# Altium PCB DATN.PcbDoc
Units mm, origin at the board's own origin, x right, y up, seen from the top; angles counter-clockwise.
Board outline 57.94 x 44.83 mm, 2 copper layers (Top Layer, Bottom Layer); 22 components, 21 nets, 75 pads, 92 vias.
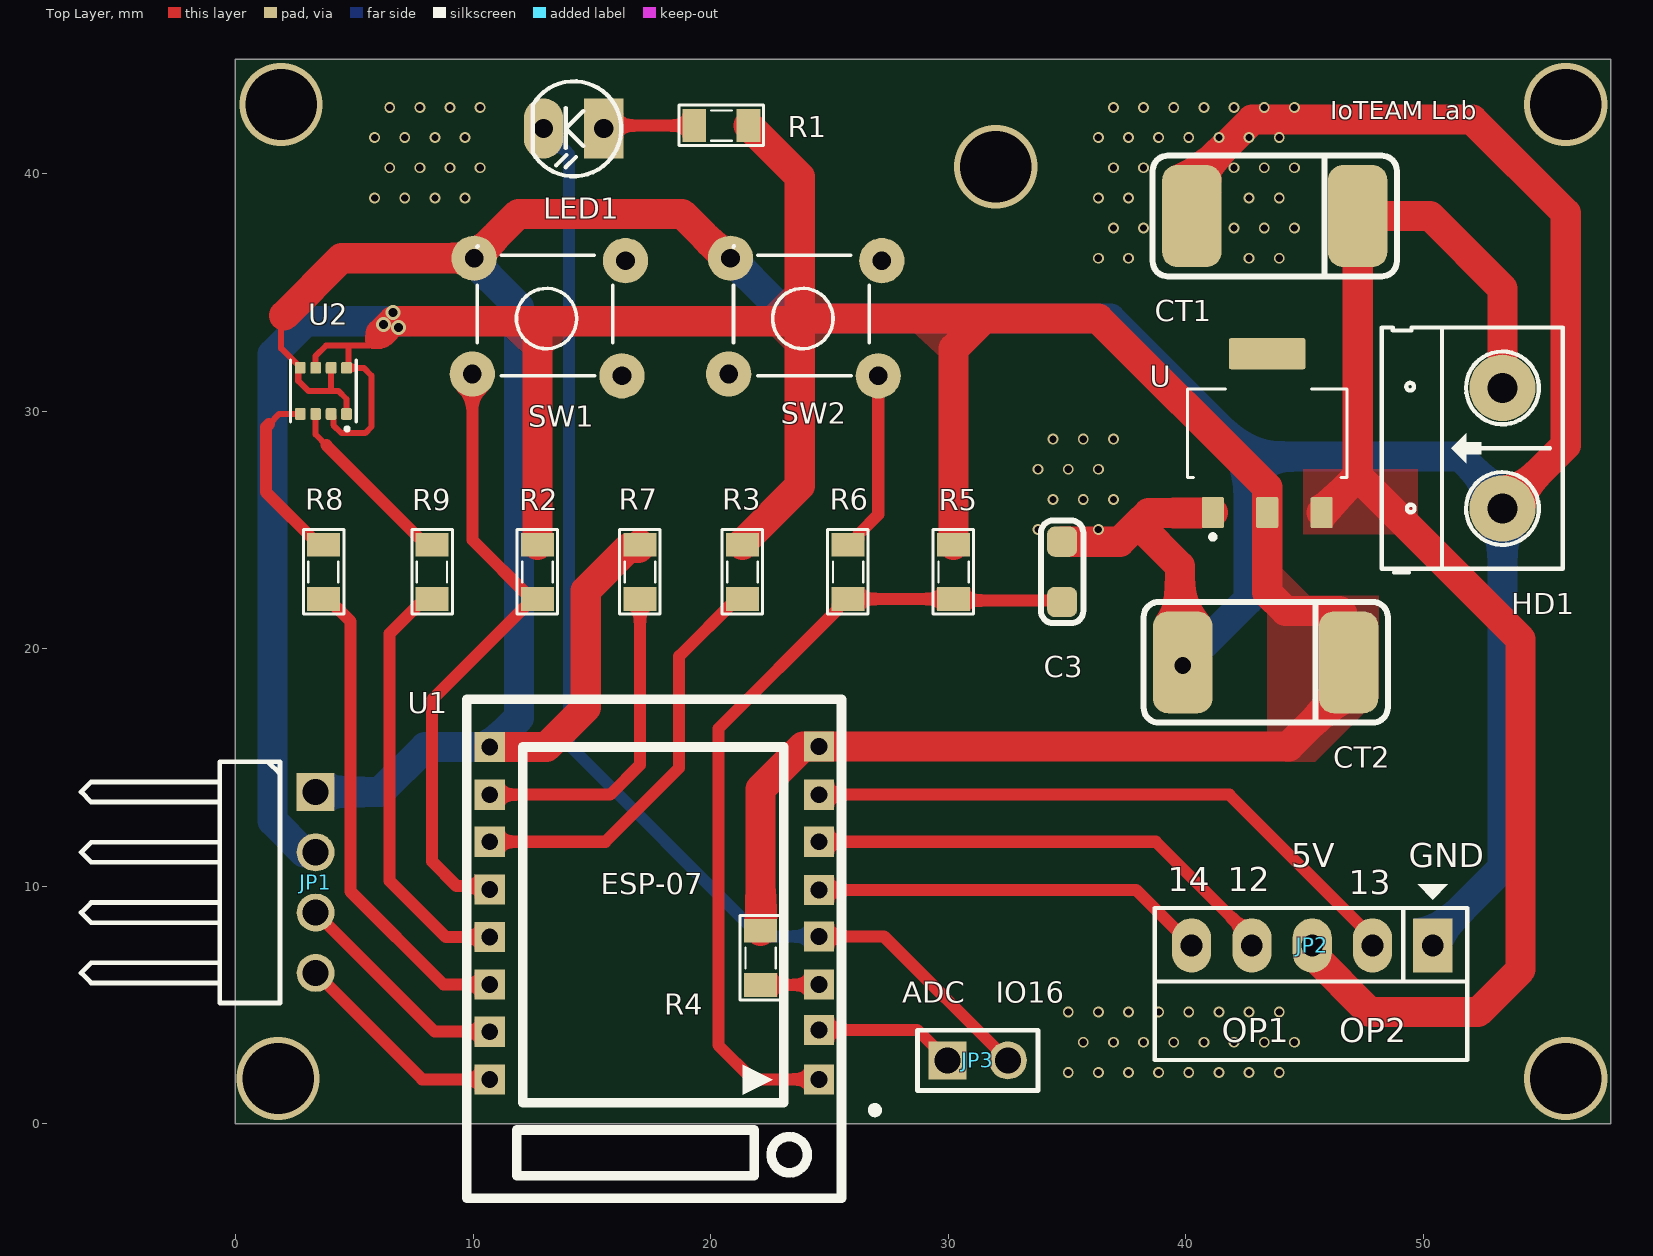
[diagram p0: Top Layer view]
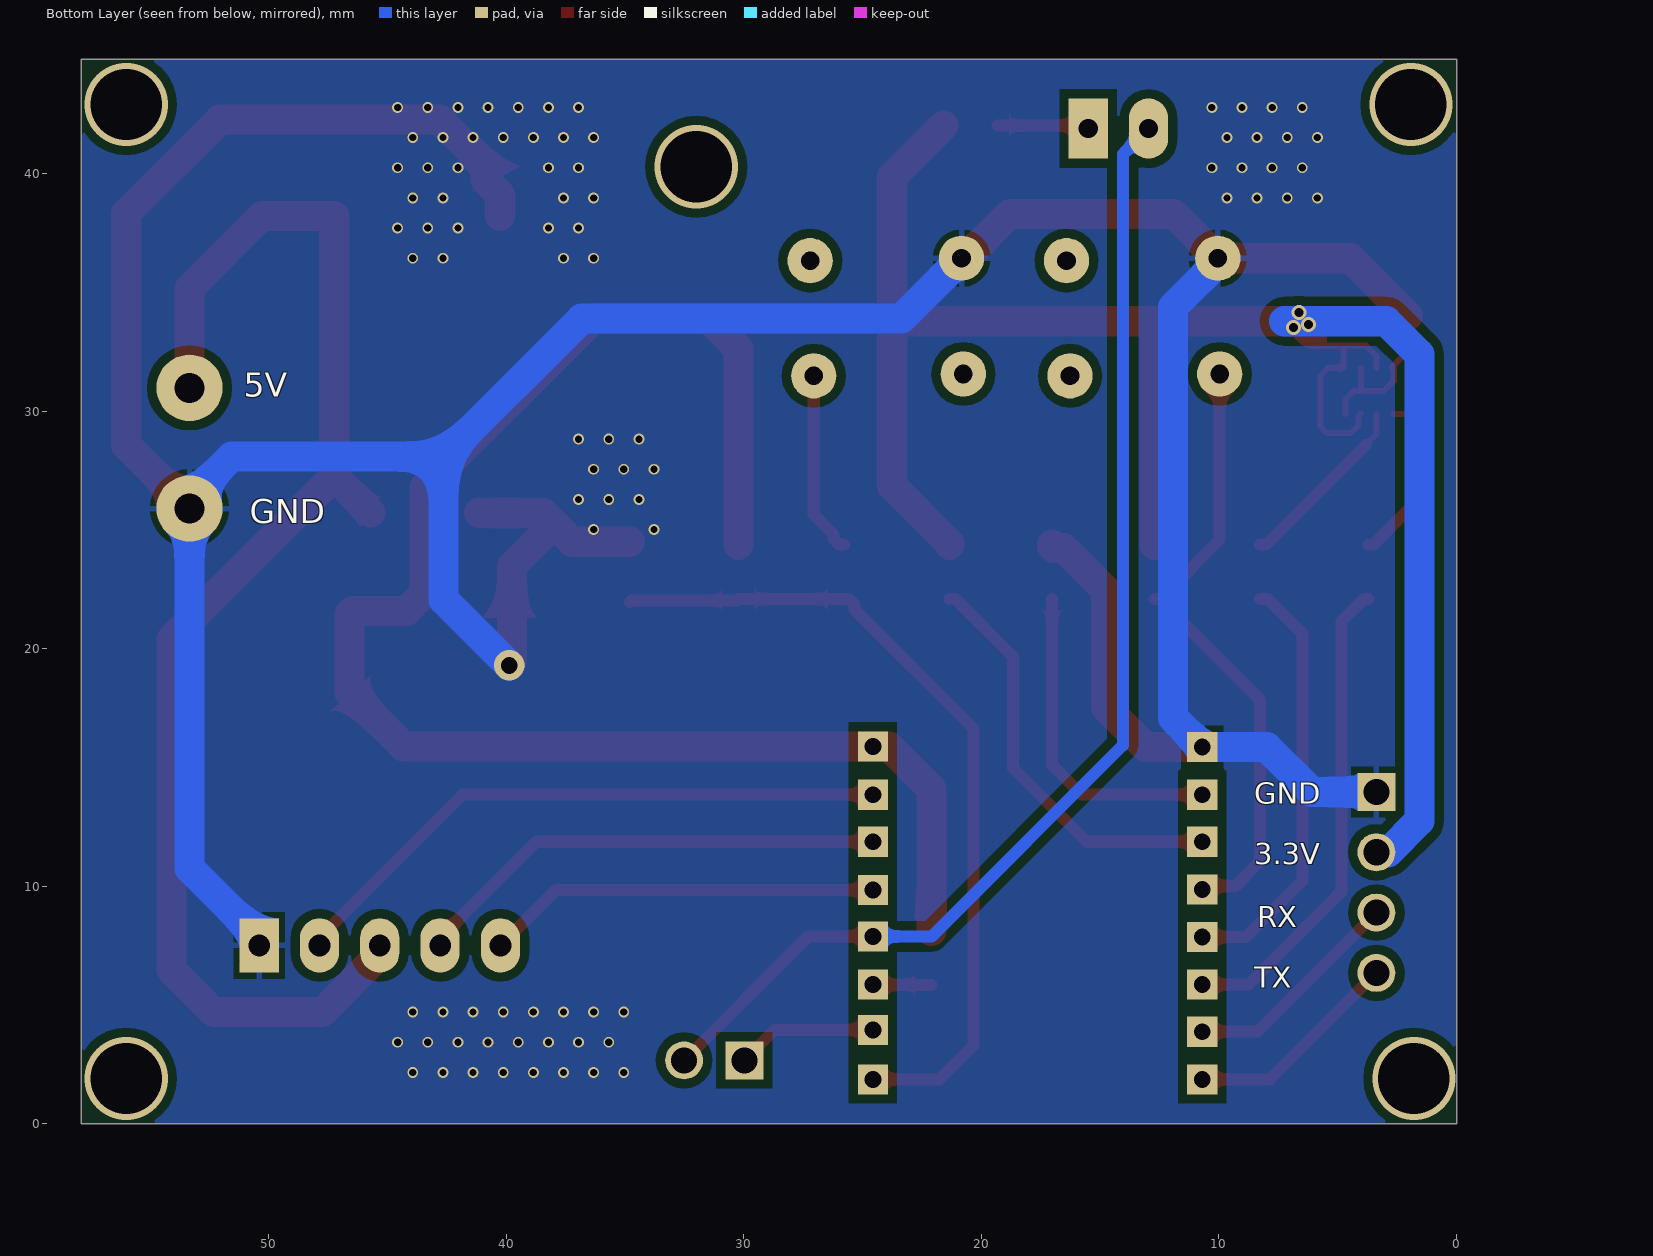
[diagram p1: Bottom Layer view, seen from below]

## Layer stack, top to bottom
Top Solder: solder mask 0.0102, Solder Resist, Dk 3.5
Top Layer: signal copper 0.0356
Dielectric 1: dielectric 0.32, FR-4, Dk 4.8
Bottom Layer: signal copper 0.0356
Bottom Solder: solder mask 0.0102, Solder Resist, Dk 3.5

## Board outline
-0.021,-0.008 -0.021,44.823 57.916,44.823 57.916,-0.008

## Design rules (kind name [scope] priority, off if disabled: settings)
Clearance "Stitching No Net" [IsStitchingVia and InNet('No Net') vs (IsVia and (Not IsStitchingVia)) Or IsPad] p1: gap=0.127 ignorepadtopadclearanceinfootprint=FALSE
Clearance [All] p2: gap=0.381 ignorepadtopadclearanceinfootprint=TRUE
PolygonConnect [All] p1: thpad.connectstyle=Relief thpad.reliefconductorwidth=0.254 thpad.reliefentries=4 thpad.polygonreliefangle="90 Angle" thpad.airgapwidth=0.254 smdpad.connectstyle=Relief smdpad.reliefconductorwidth=0.254 smdpad.reliefentries=4 smdpad.polygonreliefangle="90 Angle" smdpad.airgapwidth=0.254 via.connectstyle=Direct via.reliefconductorwidth=0.254 via.reliefentries=4 via.polygonreliefangle="90 Angle" via.airgapwidth=0.254
RoutingVias [All] p1: holewidth=0.711 width=1.27 viastyle="Through Hole" minholewidth=0.711 minwidth=1.27 maxholewidth=0.711 maxwidth=1.27
SolderMaskExpansion [All] p1: expansion=0.102
Width [All] p1: maxlimit=1.27 minlimit=0.254 preferedwidth=0.508
30 further rules are at their usual default settings.

## Components (designator, comment, footprint, x,y, rotation, side; value= is the part's Value field where it differs from the comment)
C3 "470pF" CAP_0805 34.802,23.233 r270 top value=100pF
CT1 "CAP_TAN_SMD" CAP_7343 43.819,38.219 r180 top (schematic designator C1)
CT2 "CAP_TAN_SMD" CAP_7343 43.438,19.423 r180 top (schematic designator C2)
HD1 "Header 2" HED2 53.344,25.9 r90 top
JP1 "JP4" JP4-D1C 0.822,5.072 r270 top
JP2 "JP5_2" JP5H 50.412,7.5 r180 top
JP3 "JP2" JP2-D1T 29.976,2.659 r0 top
LED1 "LED" LED-3 15.498,41.902 r180 top value="LED 3 ly Single Colour"
R1 "470" RES-SMD-0805 20.451,42.029 r180 top value="R1/4W - 1K"
R2 "10k" RES-SMD-0805 12.704,23.233 r270 top value="R1/4W - 1K"
R3 "10k" RES-SMD-0805 21.34,23.233 r270 top value="R1/4W - 1K"
R4 "10k" RES-SMD-0805 22.102,6.977 r270 top value="R1/4W - 1K"
R5 "10k" RES-SMD-0805 30.23,23.233 r270 top value="R1/4W - 1K"
R6 "470" RES-SMD-0805 25.785,23.233 r270 top value="R1/4W - 1K"
R7 "10k" RES-SMD-0805 17.022,23.233 r270 top value="R1/4W - 1K"
R8 "4.7k" RES-SMD-0805 3.687,23.233 r90 top value="R1/4W - 1K"
R9 "4.7k" RES-SMD-0805 8.259,23.233 r90 top value="R1/4W - 1K"
SW1 "SW" SW4 16.26,31.488 r180 top value="Button chip 4 pin"
SW2 "SW" SW4 27.055,31.488 r180 top value="Button chip 4 pin"
U "AMS1117-3.3" SOT229P700X180-4N 43.438,29.075 r0 top
U1 "ESP 12" ESP12_small 17.657,7.358 r180 top
U2 "BME280" PSON65P250X250X100-8N 3.687,30.853 r270 top

## Footprints (in the part's own frame and the unit in brackets; to place one, negate y for a bottom-side part, rotate by r counter-clockwise, add the part's x,y. Pads: shape width x height; smd on the part's side, far side on the other; paste and mask are expansions set on the pad)
CAP_0805 [mm]
  rrect50% 1.27x1.27 smd: 1(-1.27,0) 2(1.27,0)
  silkscreen extent -2.16,-0.89 2.16,0.89, body extent -1.01,-0.64 1.01,0.64, height 0.61
CAP_7343 [mm] "Capacitor Tantalum 7343"
  rrect50% 2.5x4.3 smd: 1(-3.429,0) 2(3.556,0)
  silkscreen extent -5.08,-2.54 5.21,2.54, body extent -3.75,-2.14 3.75,2.16, height 2.8
ESP12_small [mm]
  rect 1.27x1.27 hole 0.71: 1(-6.91,5.499) 2(-6.91,3.416) 3(-6.91,1.511) 4(-6.91,-0.521) 5(-6.91,-2.477) 6(-6.91,-4.509) 7(-6.91,-6.49) 8(-6.91,-8.522) 9(6.963,-8.496) 10(6.963,-6.49) 11(6.963,-4.508) 12(6.963,-2.502) 13(6.963,-0.495) 14(6.963,1.511) 15(6.963,3.493) 16(6.963,5.499)
  silkscreen extent -9.41,-10.5 7.92,10.5, body extent -8.12,-9.97 8.13,14.03, height 9
HED2 [mil] "Header 2, 2 pin, hight 300mil, Pin to Pin 200, Colour Green"
  round 110 hole 50: 1(0,0) 2(200,0)
  silkscreen extent -106,-100 300,200, body extent -92,-140 302,155, height 394
JP2-D1T [mm] "2 pins, 1 row, straight, gold plating"
  rect 1.6x1.6 hole 1.1: 1(0,0)
  round 1.6 hole 1.1: 2(2.54,0)
  silkscreen extent -1.27,-1.27 3.81,1.27, body extent -1.27,-1.27 3.81,1.27, height 8.54
JP4-D1C [mm] "4 pins, 1 row, right angled, gold plating"
  rect 1.6x1.6 hole 1.1: 1(-8.89,2.54)
  round 1.6 hole 1.1: 2(-6.35,2.54) 3(-3.81,2.54) 4(-1.27,2.54)
  silkscreen extent -10.16,-7.34 0,1.04, body extent -10.16,-7.57 0,2.79, height 2.54
JP5H [mil]
  rect 65x90 hole 36: 1(0,0)
  oval 65x90 hole 36: 2(100,0) 3(200,0) 4(300,0) 5(400,0)
  silkscreen extent -57,-101 461,190, body extent -46,-15 446,424, height 99
LED-3 [mil] "LED 2 PIN, 3ly Only colour"
  rect 65x100 hole 32: 1(0,0)
  oval 65x100 hole 32: 2(100,0)
  silkscreen extent -29,-78 118,79, body extent -13,-75 125,75, height 217
PSON65P250X250X100-8N [mm]
  rrect25% 0.49x0.45 smd: 1(0.97,0.975) 2(0.97,0.325) 3(0.97,-0.325) 4(0.97,-0.975) 5(-0.97,-0.975) 6(-0.97,-0.325) 7(-0.97,0.325) 8(-0.97,0.975)
  silkscreen extent -1.3,-1.39 1.65,1.39, body extent -1.25,-1.25 1.25,1.25, height 1
RES-SMD-0805 [mil]
  rect 39.37x55 smd: 1(-45,0) 2(45,0)
  silkscreen extent -70,-34 70,33, body extent -39,-25 39,25, height 31
SOT229P700X180-4N [mm]
  rrect15% 0.93x1.31 smd: 1(-2.29,-3.345) 2(0,-3.345) 3(2.29,-3.345)
  rrect15% 3.24x1.31 smd: 4(0,3.345)
  silkscreen extent -3.36,-4.47 3.36,1.86, body extent -3.25,-3.63 3.25,3.37, height 1.65
SW4 [mil] "SW button 4pin, 250 x250 mil"
  round 75 hole 31: 1(0,0) 2(245,-195) 3(248,-3) 4(-6,-191)
  silkscreen extent 15,-215 240,0, body extent -36,-220 276,24, height 276

## Part data
C3: library part CN1, "Cap np  1pF - 472pF"
CT1 CT2: "Polazied Tantalum Capacitor"
HD1: library part Hed2, "Header 2 (Green)"
JP1: "WR-PHD 2.54 mm Angled Socket Header", Manufacturer="Würth Elektronik eiSos GmbH", partNo=613004143121, ComponentLink1 Description=Manufacturer, ComponentLink1URL=http://www.we-online.com, ComponentLink2 Description=Datasheet, ComponentLink2URL=http://katalog.we-online.de/em/datasheet/6130xx143121.pdf, Created by="Karrer Zheng", Created Date="29 March 2013", NoPins=04
JP3: "WR-PHD 2.54 mm Angled Socket Header", Manufacturer="Würth Elektronik eiSos GmbH", partNo=613002143121, ComponentLink1 Description=Manufacturer, ComponentLink1URL=http://www.we-online.com, ComponentLink2 Description=Datasheet, ComponentLink2URL=http://katalog.we-online.de/em/datasheet/6130xx143121.pdf, Created by="Karrer Zheng", Created Date="29 March 2013", NoPins=02
LED1: "LED Single colour Green and Red"
R1 R2 R3 R4 R5 R6 R7 R8 R9: library part R, "Resistor 1/4W"
SW1 SW2: library part SW4, "Switch button 4 pin"
U: "Sot223/Pkg 1-Amp 3.3-Volt Low Drop Out Voltage Regulatator", Package=None, Availability=Unavailable, MF="Advanced Monolithic Systems", MP=AMS1117-3.3, Price=None, SnapEDA_Link=https://www.snapeda.com/parts/AMS1117-3.3/Advanced%20Monolithic%20Systems/view-part/53450/?ref=snap
U1: library part ESP_12, "ESP-12 Wi-Fi Module by AI-Thinker", IC=ESP8266-EX, Vendor=Ai-thinker
U2: "DIGITAL HUMIDITY, PRESSURE AND TEMPERATURE SENSOR<br>* Digital interface I虏C (up to 3.4 MHz) and SPI (3 and 4 wire, up to 10 MHz)* Supply voltage VDD main supply voltage range: 1.71 V to 3.6 V*VDDIO interface voltage range: 1.2 V to 3.6 V<br> Operating range -40鈥", Package=None, Availability=Unavailable, MP=BME280, Price=None

## Via types
v1: diameter 0.457, hole 0.305, Top Layer to Bottom Layer, tented both sides, 83 vias
v2: diameter 3.5, hole 3, Top Layer to Bottom Layer, tented both sides, 5 vias
v3: diameter 0.635, hole 0.381, Top Layer to Bottom Layer, tented both sides, 3 vias
v4: diameter 1.27, hole 0.711, Top Layer to Bottom Layer, tented both sides, 1 vias

## Nets (pads, with @x,y where several pads share a name; then routed paths per layer and width w, separated by ;. In a path a pad name is that pad's centre, name@x,y a point inside that pad or via, vN(x,y) a via of type N, cw(c..) or ccw(c..) an arc to the next point about the centre after c; other vN are vias at no path point)
+3.3V: CT2.1 JP1.2 R1.1 R2.1 R3.1 R4.1 R5.1 U1.8 U2.2 U2.6 U2.8 U.2 | length 161.6
  Top Layer w0.254: U2.6 3.362,32.328 3.8,32.766 4.7,32.766 ; U2.2 4.11,29.785 4.11,29.414 4.449,29.075 5.443,29.075 5.715,29.347 5.715,31.496 5.388,31.823 4.745,31.823 4.745,32.721 4.7,32.766 ; 6.1,33.266 5.6,32.766 4.7,32.766
  Top Layer w1.27: 6.1,33.266 6.619,33.785 23.637,33.785 23.753,33.901 ; R2.1 12.704,33.647 12.831,33.774 ; R3.1 21.34,24.447 23.753,26.86 23.753,33.901 ; R1.1 23.753,39.87 23.753,33.901 ; R4.1 22.102,14.089 23.892,15.879 U1.8 44.351,15.879 46.613,18.142 46.613,21.459 46.482,21.59 44.208,21.59 43.438,22.36 U.2 43.438,26.793 36.33,33.901 31.496,33.901 ; R5.1 30.23,32.635 31.496,33.901 ; 23.753,33.901 31.496,33.901
  Bottom Layer w1.27: JP1.2 2.865,11.422 1.546,12.741 1.546,32.395 2.936,33.785 7.239,33.785
  other v3: 6.858,33.528 6.223,33.647 6.619,34.163
+5V: CT1.1 HD1.2 JP2.3 U.3 | length 59.2
  Top Layer w1.27: JP2.3 45.332,7.118 47.759,4.691 52.316,4.691 54.106,6.481 54.106,20.392 47.248,27.25 ; U.3 47.248,27.25 ; HD1.2 53.344,35.171 50.296,38.219 CT1.1 47.248,27.25
ADC: JP3.1 U1.2 | length 5.9
  Top Layer w0.508: U1.2 28.693,3.941 JP3.1
EN: R4.2 U1.3 | length 2.5
  Top Layer w0.508: R4.2 22.108,5.84 24.561,5.84 U1.3
GND: C3.1 CT1.2 CT2.2 HD1.1 JP1.1 JP2.1 R7.1 SW1.2 SW2.2 U1.9 U2.1 U2.5 U2.7 U.1 | length 184.9
  Top Layer w0.254: 2.036,34.028 1.909,33.901 1.909,32.646 2.712,31.843 U2.5 ; U2.5@2.629,31.823 2.629,31.276 3.052,30.853 3.941,30.853 ; U2.7 4.012,30.924 3.941,30.853 ; U2.1 4.662,30.513 4.322,30.853 3.941,30.853
  Top Layer w1.27: 2.036,34.028 4.449,36.441 SW1.2 11.904,38.308 18.793,38.308 20.66,36.441 SW2.2 ; U1.9 13.072,15.854 14.736,17.518 14.736,22.439 16.538,24.241 16.959,24.241 17.022,24.304 R7.1 ; C3.1 37.231,24.503 37.985,25.257 ; CT2.2 39.764,19.541 39.764,23.478 37.985,25.257 ; CT1.2 40.263,39.119 40.878,39.734 40.878,40.358 42.803,42.283 52.074,42.283 56.011,38.346 56.011,28.567 HD1.1 ; U.1 41.128,25.71 38.438,25.71 37.985,25.257
  Bottom Layer w1.27: JP1.1 6.082,13.962 7.974,15.854 U1.9 11.929,17.089 11.929,34.377 10.037,36.269 SW1.2 ; SW2.2 23.372,33.901 36.834,33.901 42.645,28.09 ; v4(39.882,19.296) 42.645,22.058 42.645,28.09 ; JP2.1 50.412,7.818 53.344,10.75 HD1.1 53.344,26.312 51.566,28.09 42.645,28.09
  other v1: 35.056,2.151 36.326,2.151 37.596,2.151 38.866,2.151 40.136,2.151 41.406,2.151 42.676,2.151 43.946,2.151 35.691,3.421 36.961,3.421 38.231,3.421 39.501,3.421 40.771,3.421 42.041,3.421 43.311,3.421 44.581,3.421 35.056,4.691 36.326,4.691 37.596,4.691 38.866,4.691 40.136,4.691 41.406,4.691 42.676,4.691 43.946,4.691 33.786,25.011 36.326,25.011 34.421,26.281 35.691,26.281 36.961,26.281 33.786,27.551 35.056,27.551 36.326,27.551 34.421,28.821 35.691,28.821 36.961,28.821 36.326,36.441 37.596,36.441 42.676,36.441 43.946,36.441 36.961,37.711 38.231,37.711 42.041,37.711 43.311,37.711 44.581,37.711 5.846,38.981 7.116,38.981 8.386,38.981 9.656,38.981 36.326,38.981 37.596,38.981 42.676,38.981 43.946,38.981 6.481,40.251 7.751,40.251 9.021,40.251 10.291,40.251 36.961,40.251 38.231,40.251 42.041,40.251 43.311,40.251 44.581,40.251 5.846,41.521 7.116,41.521 8.386,41.521 9.656,41.521 36.326,41.521 37.596,41.521 38.866,41.521 40.136,41.521 41.406,41.521 42.676,41.521 43.946,41.521 6.481,42.791 7.751,42.791 9.021,42.791 10.291,42.791 36.961,42.791 38.231,42.791 39.501,42.791 40.771,42.791 42.041,42.791 43.311,42.791 44.581,42.791
IO0: R2.2 SW1.3 U1.12 | length 26.4
  Top Layer w0.508: SW1.3 9.961,24.579 R2.2@12.45,22.09 ; U1.12 10.551,10.003 9.297,10.003 8.259,11.041 8.259,17.843 12.506,22.09 R2.2
IO2: R3.2 U1.11 | length 17.6
  Top Layer w0.508: U1.11 15.562,11.866 18.673,14.978 18.673,19.677 21.086,22.09 R3.2
IO4: R9.1 U1.13 | length 18
  Top Layer w0.508: R9.1 7.934,22.09 6.481,20.637 6.481,10.215 8.843,7.853 U1.13
IO5: R8.1 U1.14 | length 20.4
  Top Layer w0.508: R8.1 3.885,22.09 4.83,21.145 4.83,9.771 8.754,5.846 U1.14
IO12: JP2.4 U1.6 | length 20.2
  Top Layer w0.508: U1.6 38.743,11.866 42.792,7.818 JP2.4
IO13: JP2.2 U1.7 | length 26.1
  Top Layer w0.508: U1.7 41.842,13.847 47.872,7.818 JP2.2
IO14: JP2.5 U1.5 | length 16.7
  Top Layer w0.508: U1.5 37.918,9.834 JP2.5
IO15: R7.2 U1.10 | length 13.8
  Top Layer w0.508: U1.10 15.765,13.847 17.022,15.105 R7.2
IO16: JP3.2 LED1.2 U1.4 | length 50.4
  Top Layer w0.508: U1.4 27.296,7.878 JP3.2
  Bottom Layer w0.508: LED1.2 14.038,40.822 14.038,15.93 22.089,7.878 U1.4
NetLED1_1: LED1.1 R1.2 | length 4.2
  Top Layer w0.508: LED1.1@15.725,41.675 LED1.1 15.625,42.029 R1.2
NetR6_1: R6.1 SW2.1 | length 7.8
  Top Layer w0.508: R6.1 25.983,24.376 26.23,24.622 26.23,24.82 27.055,25.646 SW2.1
NetR8_2: R8.2 U2.4 | length 7.7
  Top Layer w0.254: 1.401,29.456 1.828,29.883 U2.4@2.629,29.883
  Top Layer w0.508: 1.401,29.456 1.274,29.329 1.274,26.59 3.489,24.376 R8.2
NetR9_2: R9.2 U2.3 | length 7.7
  Top Layer w0.254: U2.3 3.362,29.019 3.814,28.567
  Top Layer w0.508: 3.814,28.567 8.005,24.376 R9.2
RST: C3.2 R5.2 R6.2 U1.1 | length 35.1
  Top Layer w0.508: U1.1 21.763,1.859 20.324,3.298 20.324,16.629 25.341,21.645 25.341,21.844 25.587,22.09 R6.2 R5.2 30.294,22.026 34.738,22.026 C3.2
RX: JP1.3 U1.15 | length 9.4
  Top Layer w0.508: JP1.3 8.378,3.865 U1.15
TX: JP1.4 U1.16 | length 9.2
  Top Layer w0.508: JP1.4 7.845,1.859 U1.16
pads on no net: SW1.1 SW1.4 SW2.3 SW2.4 U.4
copper on no net:
  other v2: 1.782,1.897 56.011,1.897 32.004,40.292 1.909,42.918 56.011,42.918

## Polygon pours and split planes (outlines as drawn)
GND on Bottom Layer "Bottom Layer-GND" (solid, remove dead copper, pour order 36): 0,44.831 57.912,44.831 57.912,0 0,0
no net on Bottom Layer "Bottom Layer-No Net" (solid, pour order 4): -1.901,30.091
no net on Bottom Layer "Bottom Layer-No Net 1" (solid, pour order 0): 0.004,25.9
+5V on Top Layer "Top Layer-+5V" (solid, remove dead copper, pour order 32): 44.958,24.82 49.784,24.82 49.784,27.559 44.958,27.559
+3.3V on Top Layer "Top Layer-+3.3V 1" (solid, remove dead copper, pour order 30): 34.163,26.543
+3.3V on Top Layer "Top Layer-+3.3V 2" (solid, remove dead copper, pour order 28): 43.438,23.999 45.212,22.225 48.133,22.225 48.133,17.907 45.466,15.24 44.196,15.24 43.438,15.998
+3.3V on Top Layer "Top Layer-+3.3V 3" (solid, remove dead copper, pour order 26): 28.448,33.901 28.448,33.401 29.976,32 30.353,32 30.353,33.901
+3.3V on Top Layer "Top Layer-+3.3V 4" (solid, remove dead copper, pour order 20): 21.844,33.909 22.1,34.165 23.368,35.433 24.13,35.433 25.654,33.909 24.13,32.385 23.368,32.385
+3.3V on Top Layer "Top Layer-+3.3V 5" (solid, remove dead copper, pour order 18): 10.541,33.901 12.065,32.512 13.335,32.512 14.605,33.901 10.551,33.909
+3.3V on Top Layer "Top Layer-+3.3V" (solid, pour order 10): 30.23,36.314

## Silkscreen, mask and mechanical layers (free items; w line width, h text height)
Top Overlay:
  text "IoTEAM Lab" at 46.101,42.291 h0.76
  text "5V" at 44.45,10.795 h1.02
  text "GND" at 49.407,10.795 h1.02
  text "14" at 39.243,9.779 h1.02
  text "12" at 41.783,9.779 h1.02
  text "13" at 46.863,9.652 h1.02
  text "ADC" at 28.067,5.08 h0.89
  text "IO16" at 32.004,5.08 h0.89
  text "OP1" at 41.529,3.429 h1.02
  text "OP2" at 46.482,3.429 h1.02
Bottom Overlay:
  text "5V" at 51.054,30.607 h1.02
  text "GND" at 50.8,25.273 h1.02
  text "GND" at 8.509,13.462 h0.89
  text "3.3V" at 8.509,10.922 h0.89
  text "RX" at 8.382,8.255 h0.89
  text "TX" at 8.509,5.715 h0.89
Drill Drawing:
  the board outline again, w0.254

## Text inside footprints (layer, text, board x,y; h text height)
U1: Top Overlay "ESP-07" at 15.367,9.652 h0.89; Mechanical 4 ">VALUE" at 9.085,1.859 h0.89 r270; Mechanical 4 ">VALUE" at 9.085,3.865 h0.89 r270; Mechanical 4 ">VALUE" at 9.085,5.846 h0.89 r270; Mechanical 4 ">VALUE" at 9.085,7.853 h0.89 r270; Mechanical 4 ">VALUE" at 9.085,9.86 h0.89 r270; Mechanical 4 ">VALUE" at 9.085,11.866 h0.89 r270; Mechanical 4 ">VALUE" at 9.085,13.847 h0.89 r270; Mechanical 4 ">VALUE" at 9.085,15.854 h0.89 r270; Mechanical 4 ">VALUE" at 26.077,13.847 h0.89 r270; Mechanical 4 ">VALUE" at 26.077,11.866 h0.89 r270; Mechanical 4 ">VALUE" at 26.077,9.86 h0.89 r270; Mechanical 4 ">VALUE" at 26.077,7.853 h0.89 r270; Mechanical 4 ">VALUE" at 26.077,5.846 h0.89 r270; Mechanical 4 ">VALUE" at 26.077,3.865 h0.89 r270; Mechanical 4 ">VALUE" at 26.077,1.859 h0.89 r270; Mechanical 4 ">VALUE" at 26.026,1.884 h0.89 r270; Mechanical 4 ">VALUE" at 26.026,3.916 h0.89 r270; Mechanical 4 ">VALUE" at 26.052,13.847 h0.89 r270